# Altium PCB PCB1.PcbDoc
Units mm, origin at the board's own origin, x right, y up, seen from the top; angles counter-clockwise.
Board outline 37.59 x 37.85 mm, 2 copper layers (Top Layer, Bottom Layer); 15 components, 10 nets, 38 pads, 0 vias.
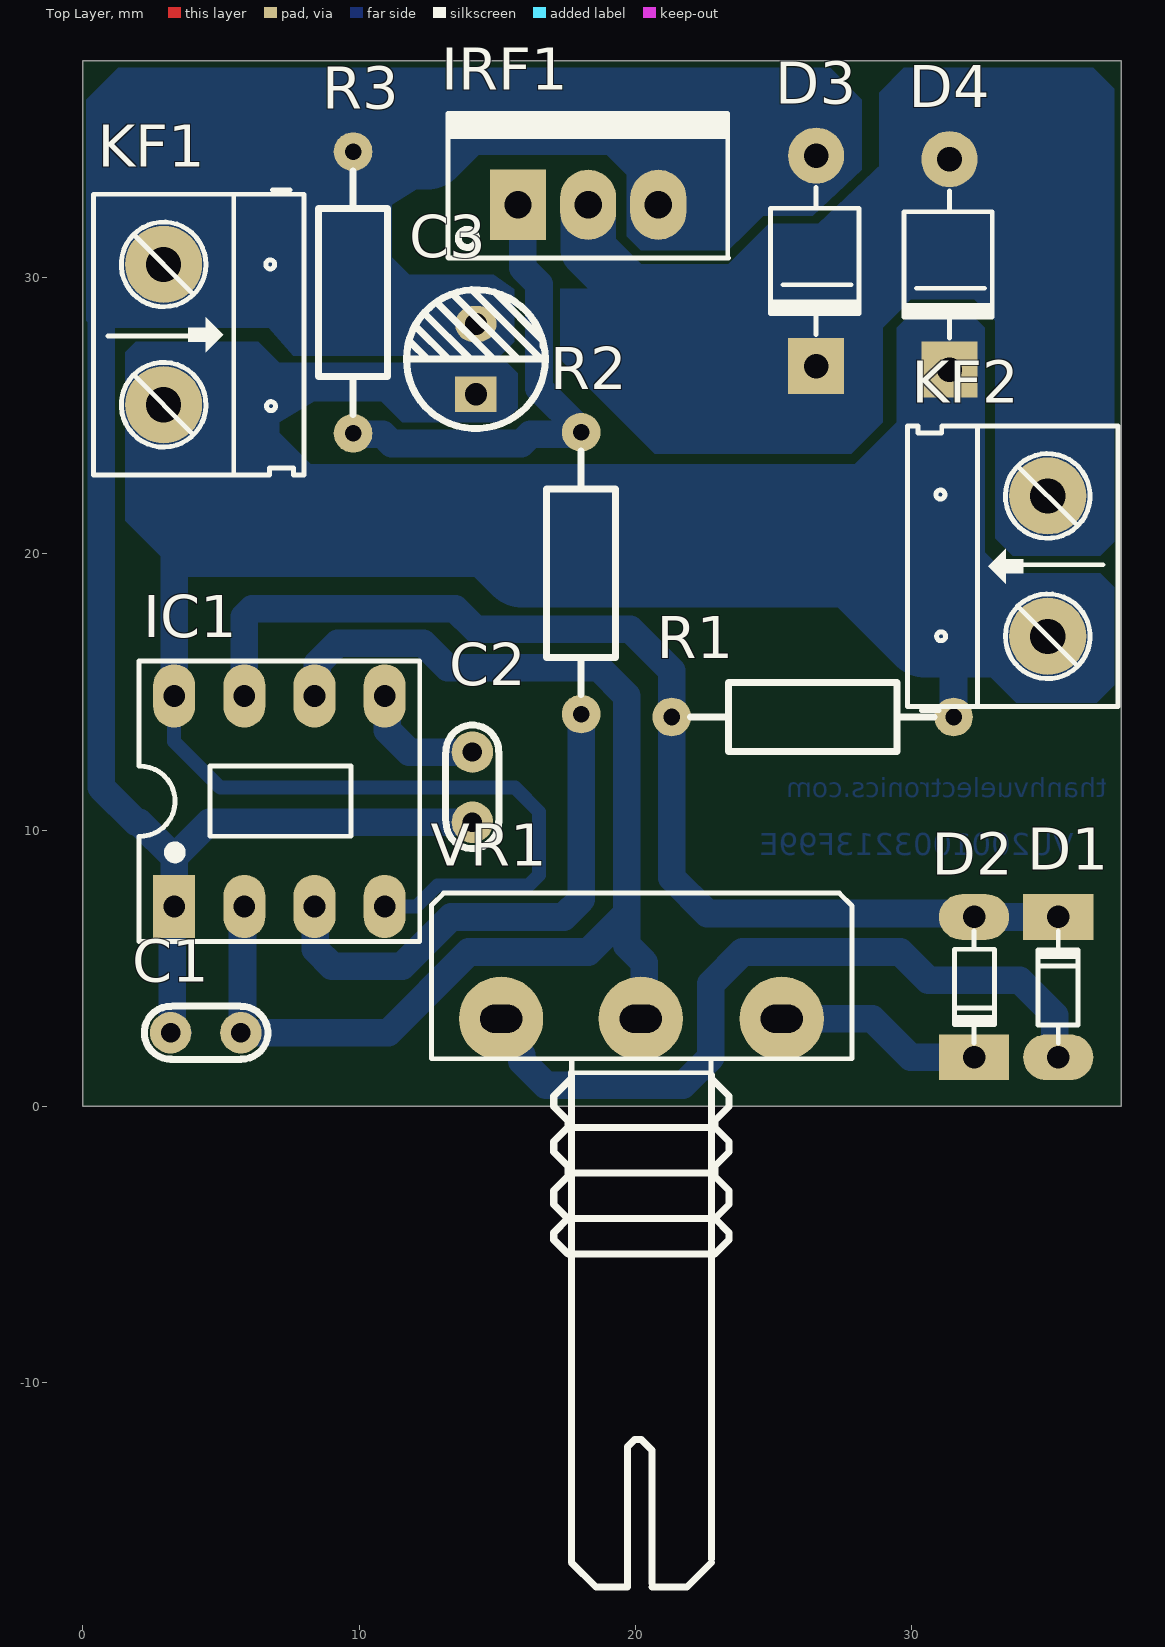
[diagram p0: Top Layer view]
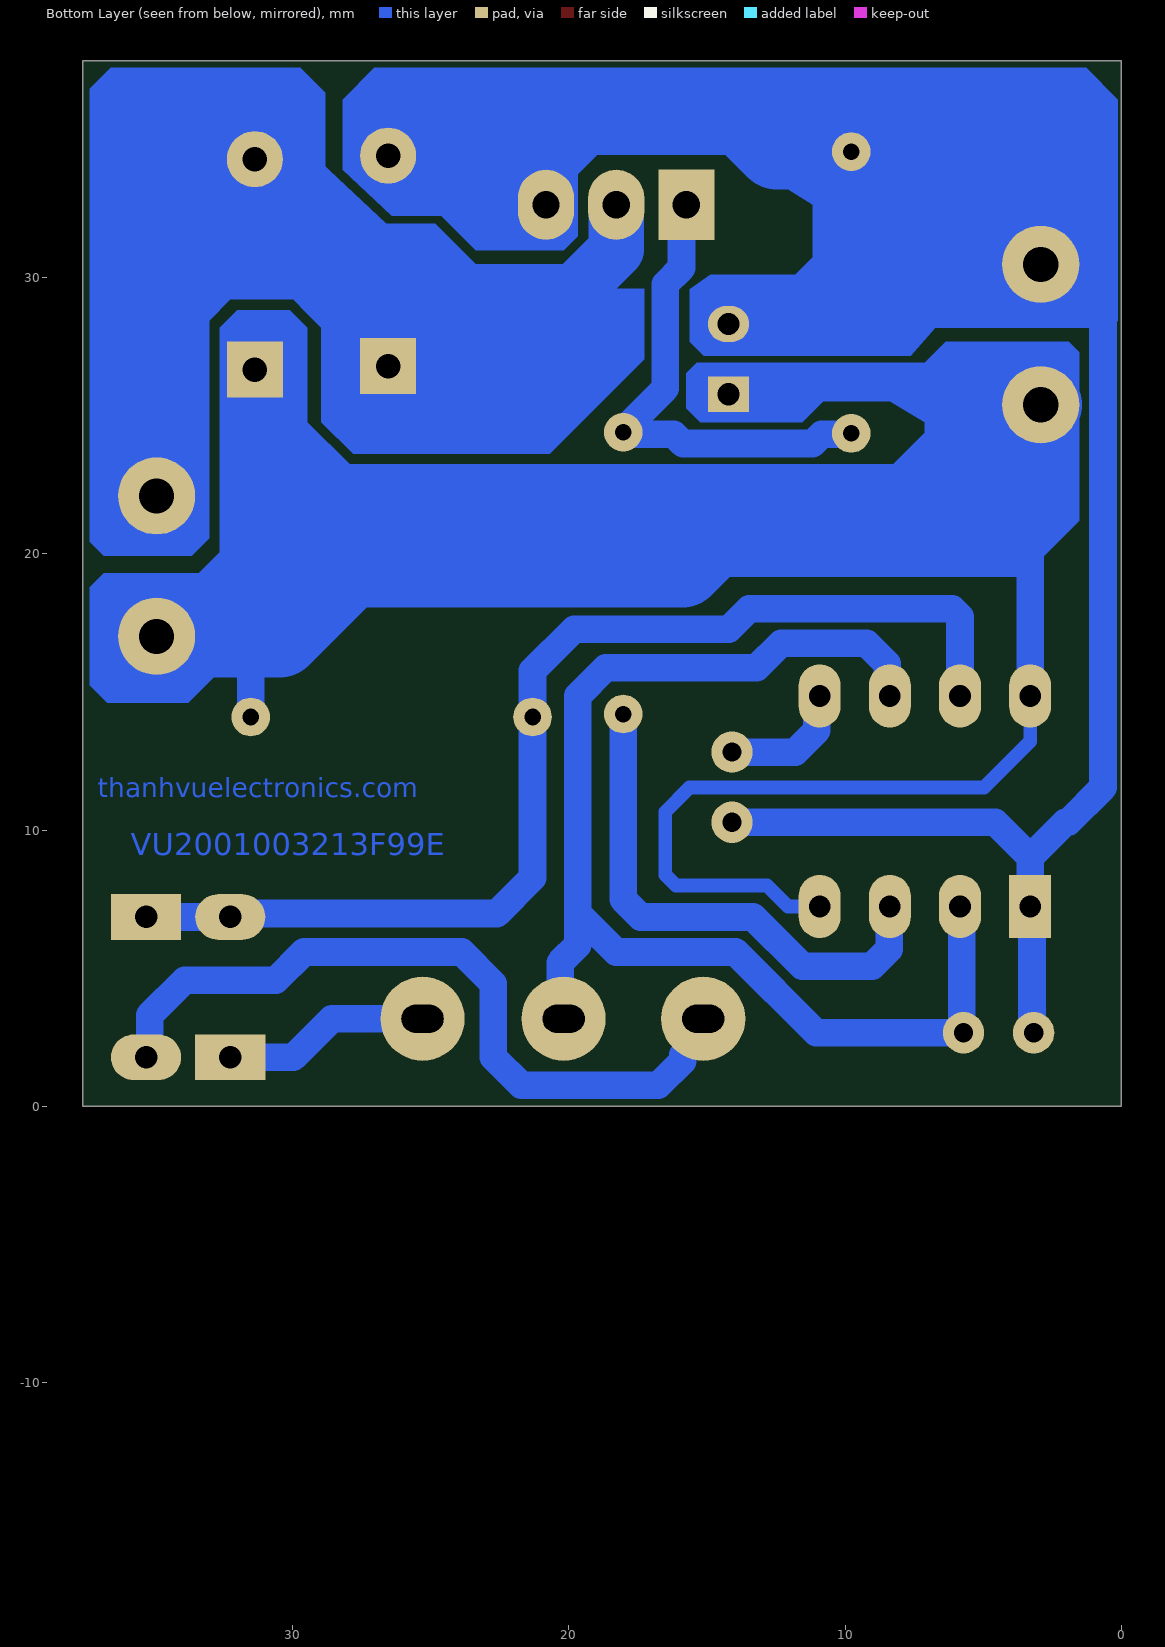
[diagram p1: Bottom Layer view, seen from below]

## Layer stack, top to bottom
Top Solder: solder mask 0.0102, Solder Resist, Dk 3.5
Top Layer: signal copper 0.0356
Dielectric 1: dielectric 0.32, FR-4, Dk 4.8
Bottom Layer: signal copper 0.0356
Bottom Solder: solder mask 0.0102, Solder Resist, Dk 3.5

## Board outline
0,0 37.592,0 37.592,37.846 0,37.846

## Design rules (kind name [scope] priority, off if disabled: settings)
Clearance [All] p1: gap=0.254 ignorepadtopadclearanceinfootprint=FALSE
PolygonConnect [All] p1: connectstyle=Relief reliefconductorwidth=0.254 reliefentries=4 polygonreliefangle="90 Angle" airgapwidth=0.254
RoutingVias [All] p1: holewidth=0.711 width=1.27 viastyle="Through Hole" minholewidth=0.711 minwidth=1.27 maxholewidth=0.711 maxwidth=1.27
SolderMaskExpansion [All] p1: expansion=0.102 istentingtop=FALSE
Width [All] p1: maxlimit=5 minlimit=0.254 preferedwidth=1
30 further rules are at their usual default settings.

## Components (designator, comment, footprint, x,y, rotation, side; value= is the part's Value field where it differs from the comment)
C1 "102" "tu gom" 4.445,2.667 r180 top
C2 "104" "tu gom" 14.097,11.557 r270 top
C3 "100uF" "tu hoa 5mm" 14.224,27.051 r90 top
D1 "1N4148" "DIODE 0.5A" 35.306,4.318 r270 top
D2 "1N4148" "DIODE 0.5A" 32.258,4.318 r90 top
D3 "1N4007" "DIODE 1A" 26.543,35.687 r90 top
D4 "1N4007" "DIODE 1A" 31.369,35.56 r90 top
IC1 "NE555" DIP8/W0.3 3.302,7.239 r0 top
IRF1 "IRF3205" QTO-220 15.748,32.639 r0 top
KF1 "12V DC" "Con 2 KF301 5.08" 2.921,30.48 r270 top
KF2 "OUT" "Con 2 KF301 5.08" 34.925,17.018 r90 top
R1 "1k" "tro vach 1/4w" 26.416,14.097 r180 top
R2 "47R" "tro vach 1/4w" 18.034,19.304 r90 top
R3 "10k" "tro vach 1/4w" 9.779,29.464 r270 top
VR1 "50K" "Bien Tro Volume Don" 15.138,3.175 r0 top

## Footprints (in the part's own frame and the unit in brackets; to place one, negate y for a bottom-side part, rotate by r counter-clockwise, add the part's x,y. Pads: shape width x height; smd on the part's side, far side on the other; paste and mask are expansions set on the pad)
"Bien Tro Volume Don" [mil] "Volume control single"
  round 120 hole 40 slot 60 at 0 deg: 1(0,0) 2(199,0) 3(400,0)
  silkscreen extent -99,-810 500,179, body extent -110,-818 510,188, height 839
"Con 2 KF301 5.08" [mil]
  round 110 hole 50: 1(0,0) 2(200,0)
  silkscreen extent -106,-100 300,200, body extent -45,-97 255,190, height 335
"DIODE 0.5A" [mil] "Diode muoi, xung"
  oval 65x100 hole 32: 1(100,0)
  rect 65x100 hole 32: 2(-100,0)
  silkscreen extent -80,-30 80,28, body extent -108,-33 108,32, height 61
"DIODE 1A" [mil] "Diode 1A"
  round 80 hole 35: 1(-50,0)
  rect 80x80 hole 35: 2(-350,0)
  silkscreen extent -305,-61 -95,65, body extent -366,-61 -34,65, height 122
DIP8/W0.3 [mil] "8 PIN, W 300mil, Pin to pin 100mil"
  rect 60x90 hole 31: 1(0,0)
  oval 60x90 hole 31: 2(100,0) 3(200,0) 4(300,0) 5(300,300) 6(200,300) 7(100,300) 8(0,300)
  silkscreen extent -50,-50 350,350, body extent -50,-40 350,336, height 201
QTO-220 [mil] "TO-220 - 1-2-3"
  rect 80x100 hole 39: 1(0,0)
  oval 80x100 hole 39: 2(100,0) 3(200,0)
  silkscreen extent -100,-76 300,130, body extent -119,-64 322,121, height 755
"tro vach 1/4w" [mm]
  round 1.4 hole 0.6: 1(-5.1,0) 2(5.1,0)
  silkscreen extent -4.39,-1.25 4.42,1.25, body extent -5.38,-1.2 5.38,1.2, height 2.41
"tu gom" [mm] "Tu gom mini"
  round 1.5 hole 0.7: 1(-1.27,0) 2(1.27,0)
  silkscreen extent -2.25,-0.97 2.22,0.97, body extent -2.92,-0.85 2.92,0.85, height 6.12
"tu hoa 5mm" [mm]
  rect 1.3x1.5 hole 0.8: 1(-1.27,0)
  oval 1.3x1.5 hole 0.8: 2(1.27,0)
  silkscreen extent -2.51,-2.51 2.51,2.51, body extent -3.12,-3.18 3.23,3.18, height 14.55

## Part data
C1: library part "Tu gom 102 50V", "Cắm", Chung_Loai=Cắm, Don_Vi=Con, Ma_Hang=MH004763, So_Chan=2, Ten_Linh_Kien="Tụ gốm 102 1nF 50V"
C2: library part "Tu gom 104 50V", "Cắm", Chung_Loai=Cắm, Don_Vi=Con, Ma_Hang=MH004761, So_Chan=2, Ten_Linh_Kien="Tụ gốm 104 100nF 50V"
C3: library part "Tu Hoa 100uF 25V 6x11", "Cắm", Chung_Loai=Cắm, Don_Vi=Con, Ma_Hang=MH001351, So_Chan=2, Ten_Linh_Kien="Tụ Hóa 100uF 25V 6x11MM"
D1 D2: library part "Diode 1N4148", "Cắm", Chung_Loai=Cắm, Don_Vi=Con, Ma_Hang=MH001065, Ten_Linh_Kien="Diode 1N4148 DO35 450mA 100V ( 1N4148 DIP)"
D3 D4: library part "Diode 1N4007", "Cắm", Chung_Loai=Cắm, Don_Vi=Con, Ma_Hang=MH001063, Ten_Linh_Kien="Diode 1N4007 1A (DIP)"
KF1 KF2: library part "CON 2 KF301", "Cắm", Chung_Loai=Cắm, Don_Vi=Con, Ma_Hang=MH000987, Ten_Linh_Kien="CON 2 KF301-2P 5.08MM Xanh Dương"
R1: library part "Tro Vach 1/4W 5% 1k", "Cắm", Chung_Loai=Cắm, Don_Vi=Con, Ma_Hang=MH007390, So_Chan=2, Ten_Linh_Kien="Trở Vạch 1/4w 5% 1k"
R2: library part "Tro Vach 1/4W 5% 47R", "Cắm", Chung_Loai=Cắm, Don_Vi=Con, Ma_Hang=MH007321, So_Chan=2, Ten_Linh_Kien="Trở Vạch 1/4w 5% 47R"
R3: library part "Tro Vach 1/4W 5% 10k", "Căm", Chung_Loai=Cắm, Don_Vi=Con, Ma_Hang=MH007354, So_Chan=2, Ten_Linh_Kien="Trở Vạch 1/4w 5% 10K"
VR1: library part "Triet Ap Don 50k", "Cắm", Chung_Loai=Cắm, Don_Vi=Con, Ma_Hang=MH001419, Ten_Linh_Kien="Triết Áp Đơn B50K"

## Nets (pads, with @x,y where several pads share a name; then routed paths per layer and width w, separated by ;. In a path a pad name is that pad's centre, name@x,y a point inside that pad or via, vN(x,y) a via of type N, cw(c..) or ccw(c..) an arc to the next point about the centre after c; other vN are vias at no path point)
NetC1_1: C1.1 IC1.2 IC1.6 VR1.2 | length 46.3
  Bottom Layer w1: IC1.2 5.779,7.175 5.779,2.73 C1.1 11.049,2.667 13.97,5.588 18.288,5.588 19.685,6.985 ; IC1.6 8.482,14.959 8.482,16.022 9.226,16.766 12.317,16.766 13.208,15.875 18.669,15.875 19.685,14.859 19.685,6.985 ; VR1.2@20.168,2.794 20.32,2.946 20.32,5.207 19.685,5.842 19.685,6.985
NetC1_2: C1.2 C2.2 C3.2 D3.1 IC1.1 IRF1.3 KF1.1 R3.1 | length 69.2
  Bottom Layer w1: KF1.1 2.436,30.48 1.705,29.749 1.555,29.749 0.667,28.861 0.667,11.547 1.927,10.287 2.032,10.287 3.302,9.017 ; C1.2 3.238,2.73 3.238,7.175 IC1.1 3.302,9.017 ; C1.2@3.333,2.763 C1.2@3.429,2.667 ; C2.2 4.572,10.287 3.302,9.017
  Bottom Layer w3: KF1.1 2.921,32.004 5.608,34.691 10.033,34.691 12.466,34.691 13.716,35.941 19.588,35.941 20.906,34.622 ; IRF1.3@21.542,32.639 21.669,32.766 21.971,32.766 23.622,34.417 D3.1
NetC2_1: C2.1 IC1.5 | length 4.7
  Bottom Layer w1: IC1.5 11.022,14.759 11.022,13.616 11.811,12.827 C2.1
NetC3_1: C3.1 D4.2 IC1.4 IC1.8 KF1.2 KF2.1 R1.1 | length 81.1
  Bottom Layer w0.5: IC1.8 3.302,13.208 4.969,11.541 15.637,11.541 16.51,10.668 16.51,8.382 16.129,8.001 12.827,8.001 12.065,7.239 IC1.4
  Bottom Layer w1: IC1.8 3.302,20.193 4.826,21.717 ; 30.48,17.018 31.516,15.982 R1.1
  Bottom Layer w2: 31.369,17.907 D4.2
  Bottom Layer w3: KF1.2 3.048,25.273 3.048,23.495 4.826,21.717 13.737,21.717 15.896,19.558 27.94,19.558 30.48,17.018 31.389,17.018 31.897,17.018 KF2.1@35.687,17.018
NetD1_1: D1.1 VR1.1 | length 27.2
  Bottom Layer w1: VR1.1@15.113,2.794 15.113,2.646 15.883,1.876 15.883,1.643 16.764,0.762 21.717,0.762 22.733,1.778 22.733,4.445 23.876,5.588 29.591,5.588 30.607,4.572 33.909,4.572 35.179,3.302 35.179,1.905 D1.1
NetD1_2: D1.2 D2.1 IC1.7 R1.2 | length 41.6
  Bottom Layer w1: IC1.7 5.842,17.729 6.133,18.02 13.471,18.02 14.219,17.272 19.812,17.272 21.316,15.768 R1.2 21.316,8.275 22.606,6.985 29.649,6.985 29.651,6.983 32.133,6.983 D2.1 D1.2 D1.2@35.242,6.921
NetD2_2: D2.2 VR1.3 | length 7.5
  Bottom Layer w1: VR1.3 28.575,3.175 29.972,1.778 D2.2
NetD3_2: D3.2 D4.1 IRF1.2 KF2.2 | length 35.1
  Bottom Layer w2: IRF1.2 18.288,31.008 22.499,26.797
  Bottom Layer w3: 22.499,26.797 D3.2 26.543,27.94 31.369,32.766 D4.1 32.131,33.528 35.687,29.972 KF2.2@35.687,22.098
NetIC1_3: IC1.3 R2.1 | length 19.1
  Bottom Layer w1: IC1.3 8.41,7.211 8.41,5.687 9.017,5.08 11.557,5.08 13.335,6.858 17.399,6.858 18.034,7.493 R2.1
NetIRF1_1: IRF1.1 R2.2 R3.2 | length 17.8
  Bottom Layer w1: R3.2 9.817,24.326 10.853,24.326 11.184,23.995 15.867,23.995 16.199,24.327 17.957,24.327 R2.2 18.034,24.467 16.51,25.991 16.51,29.767 15.924,30.353 15.924,32.463 IRF1.1

## Other copper
Bottom Layer:
  region net NetD3_2: 37.338,20.447 36.83,19.939 33.655,19.939 33.02,20.574 33.02,28.448 32.258,29.21 28.829,29.21 28.829,36.703 29.718,37.592 36.576,37.592 37.338,36.83
  region net NetD3_2: 28.956,34.163 26.612,31.946 24.834,31.946 23.368,30.48 20.066,30.48 20.066,29.718 21.717,28.067 28.956,28.067 28.956,28.194 30.48,29.718 29.718,30.48 29.718,34.29
  region net NetC1_2: 6.731,28.194 0.381,28.194 0.127,28.448 0.127,36.449 1.27,37.592 12.192,37.592 12.192,33.274 11.176,32.639 11.176,30.734 11.938,29.972
  region net NetC1_2: 9.398,27.178 15.113,27.178 15.621,27.686 15.621,29.578 14.877,30.099 8.128,30.099 8.128,29.718 6.667,28.258 6.985,27.94 6.731,28.194 7.62,27.178
  region net NetC3_1: 7.112,24.765 8.382,25.527 10.795,25.527 11.557,24.765 15.24,24.765 15.748,25.273 15.748,26.543 15.367,26.924 5.35,26.924
  region net NetC3_1: 31.242,17.145 33.782,14.605 36.703,14.605 37.338,15.24 37.338,18.796 36.83,19.304 33.401,19.304 32.639,20.066 32.639,28.194 32.004,28.829 30.099,28.829 29.464,28.194 29.464,24.765 27.94,23.241 10.214,23.241 10.67,22.444
  region net NetC1_2: 6.985,37.592 27.051,37.592 28.194,36.449 28.194,33.909 26.416,32.241 24.621,32.241 24.003,31.623 23.368,30.988 20.193,30.988 19.685,31.496 19.685,34.29 19.177,34.29 17.526,35.941 8.636,35.941
  region net NetD3_2: 17.272,29.591 17.272,27.051 20.701,23.622 27.813,23.622 28.956,24.765 28.956,29.591
  region net NetC3_1: 3.556,19.177 14.351,19.177 10.287,23.241 8.255,23.241 7.112,24.384 7.112,26.924 6.35,27.686 1.905,27.686 1.524,27.305 1.524,21.209
  text "thanhvuelectronics.com" at 37.061,11.199 h0.7
  text "VU2001003213F99E" at 35.868,9.09 h0.8